# Altium PCB SMART_WATCH.PcbDoc (part 1 of 4)
Units mil, origin at the board's own origin, x right, y up, seen from the top; angles counter-clockwise.
Board outline 2401.57 x 2362.2 mil, 2 copper layers (Top Layer, Bottom Layer); 98 components, 64 nets, 344 pads, 272 vias.
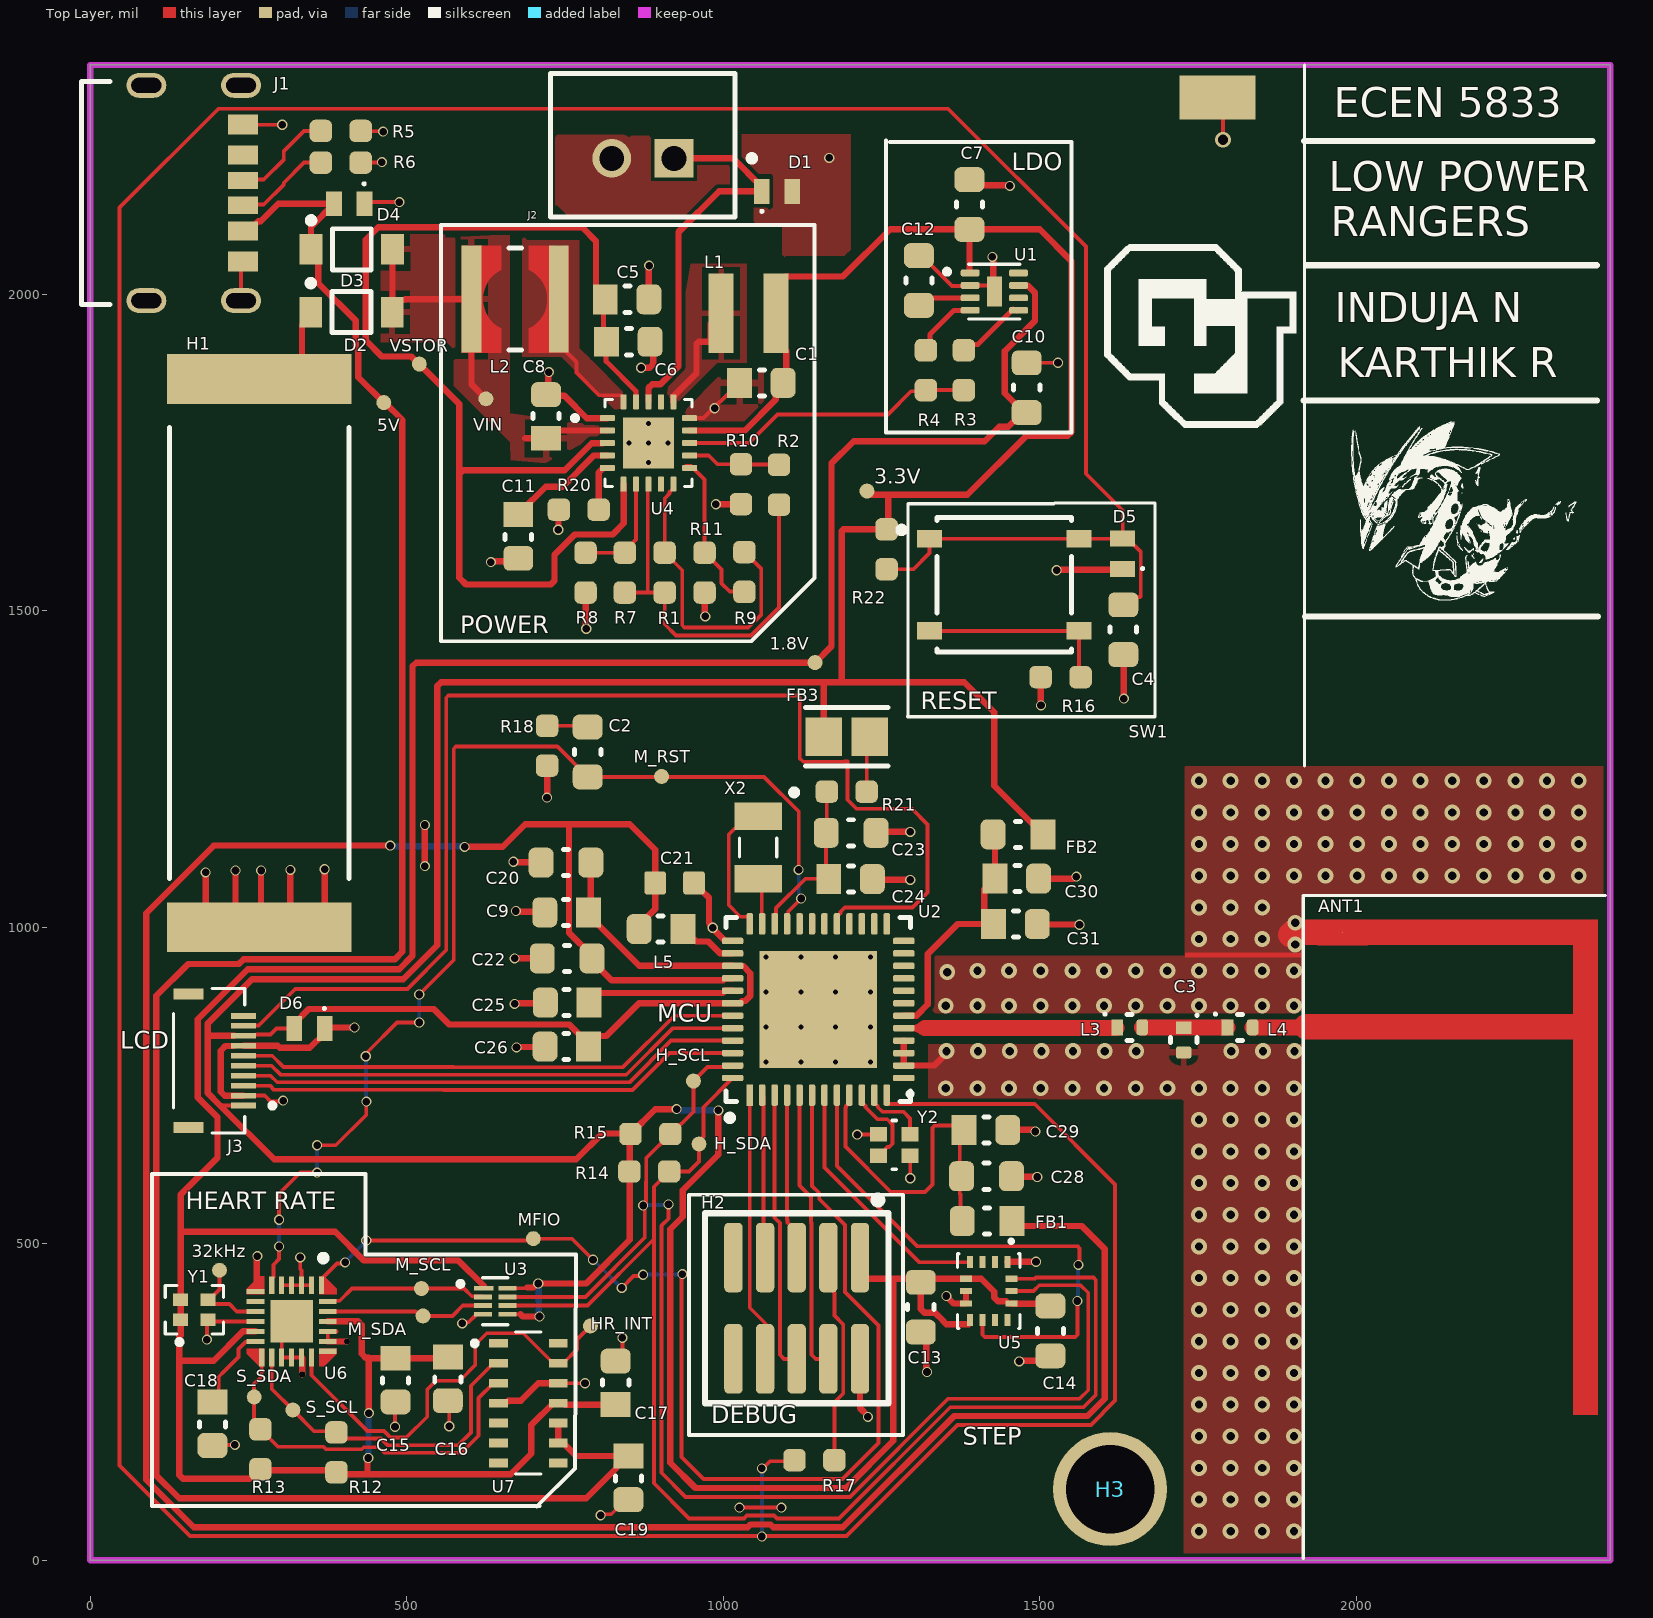
[diagram p0: Top Layer view]
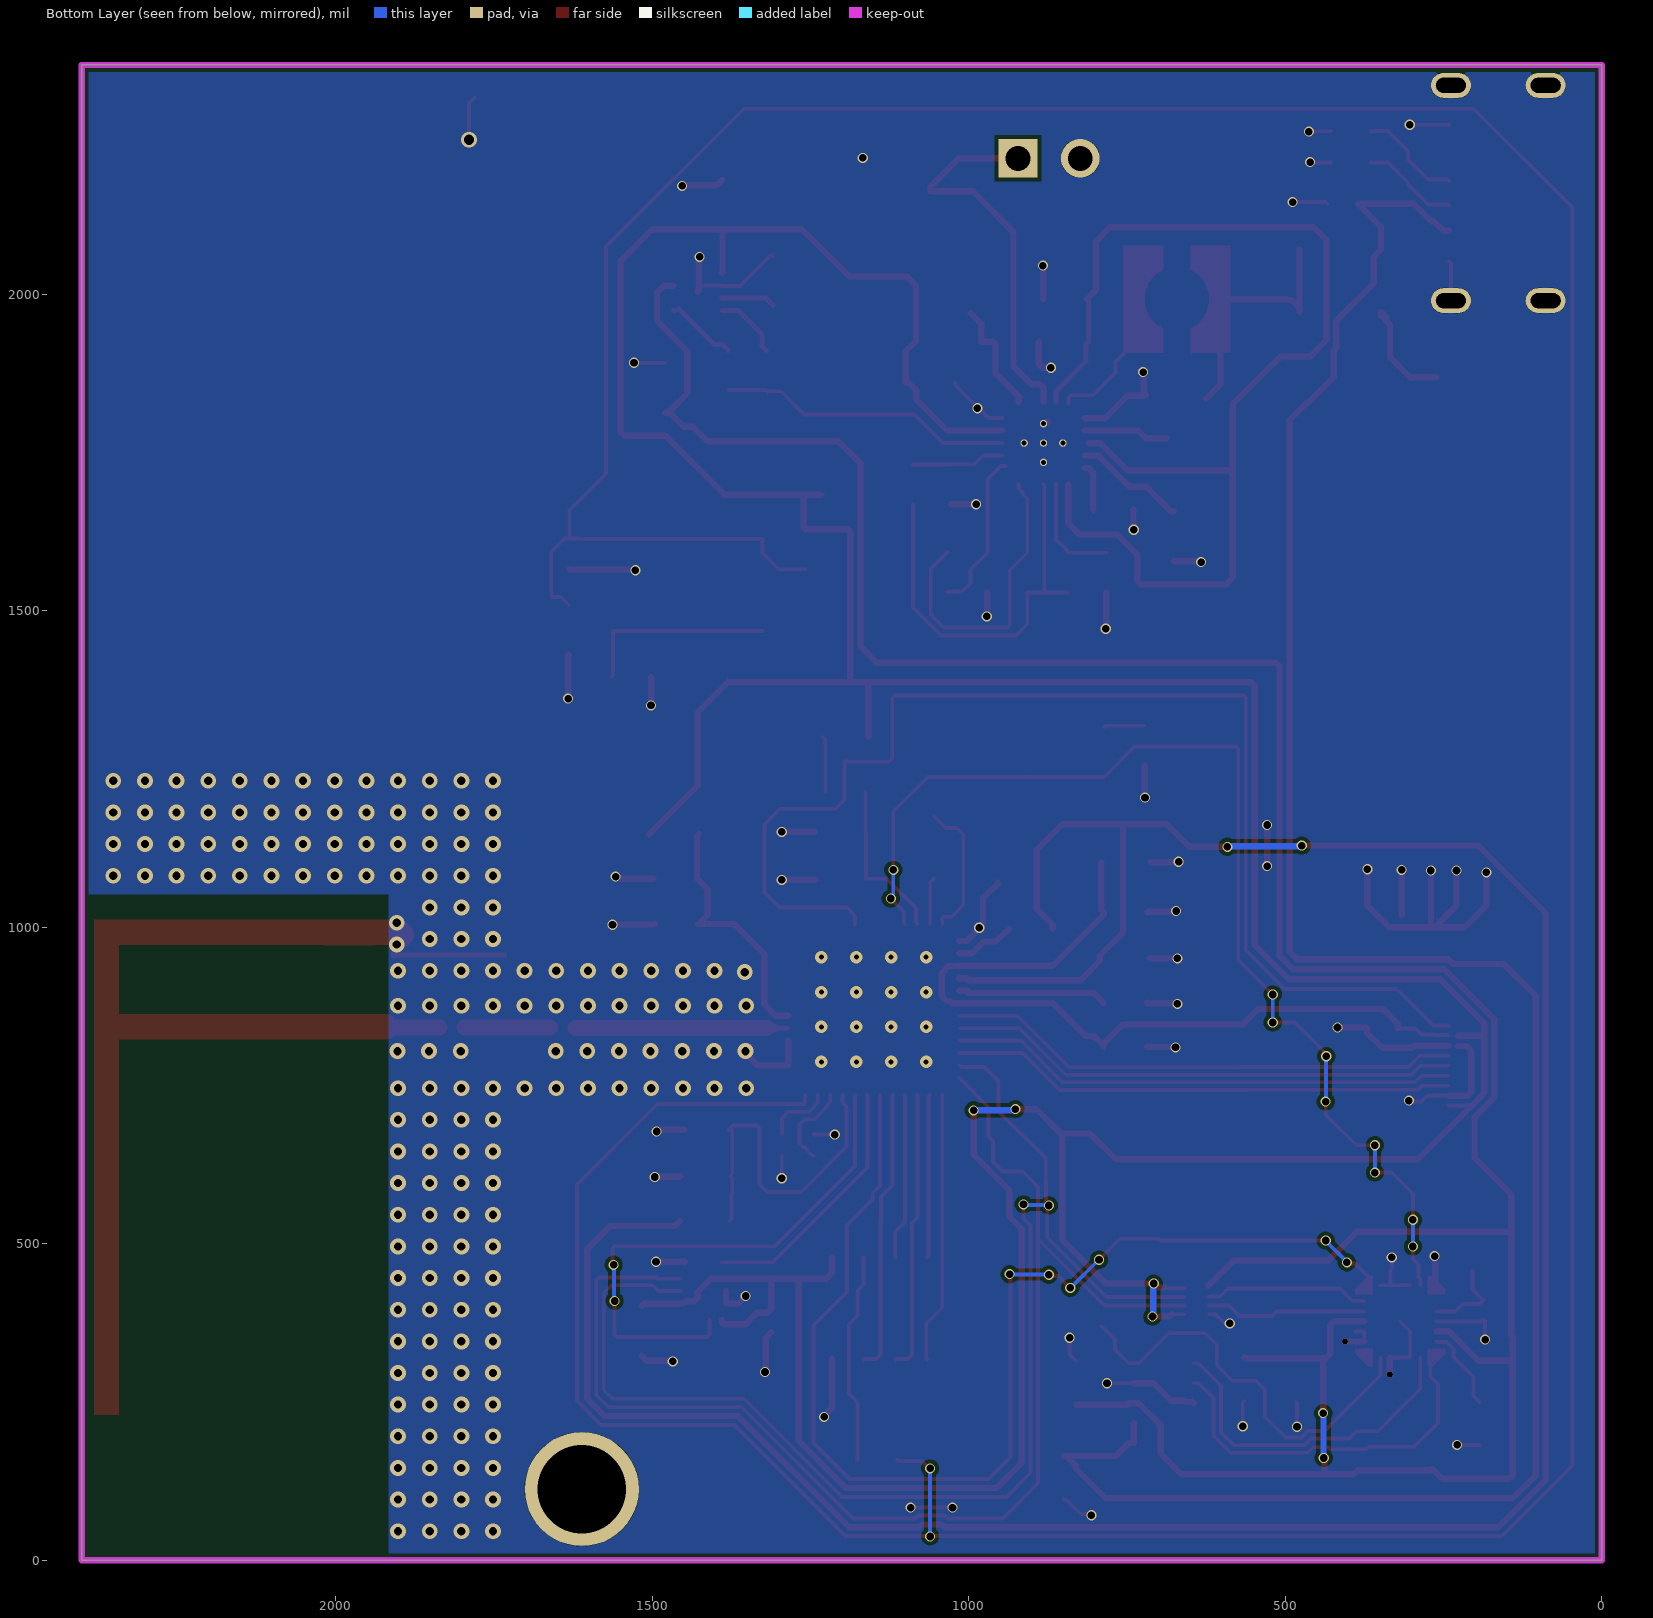
[diagram p1: Bottom Layer view, seen from below]
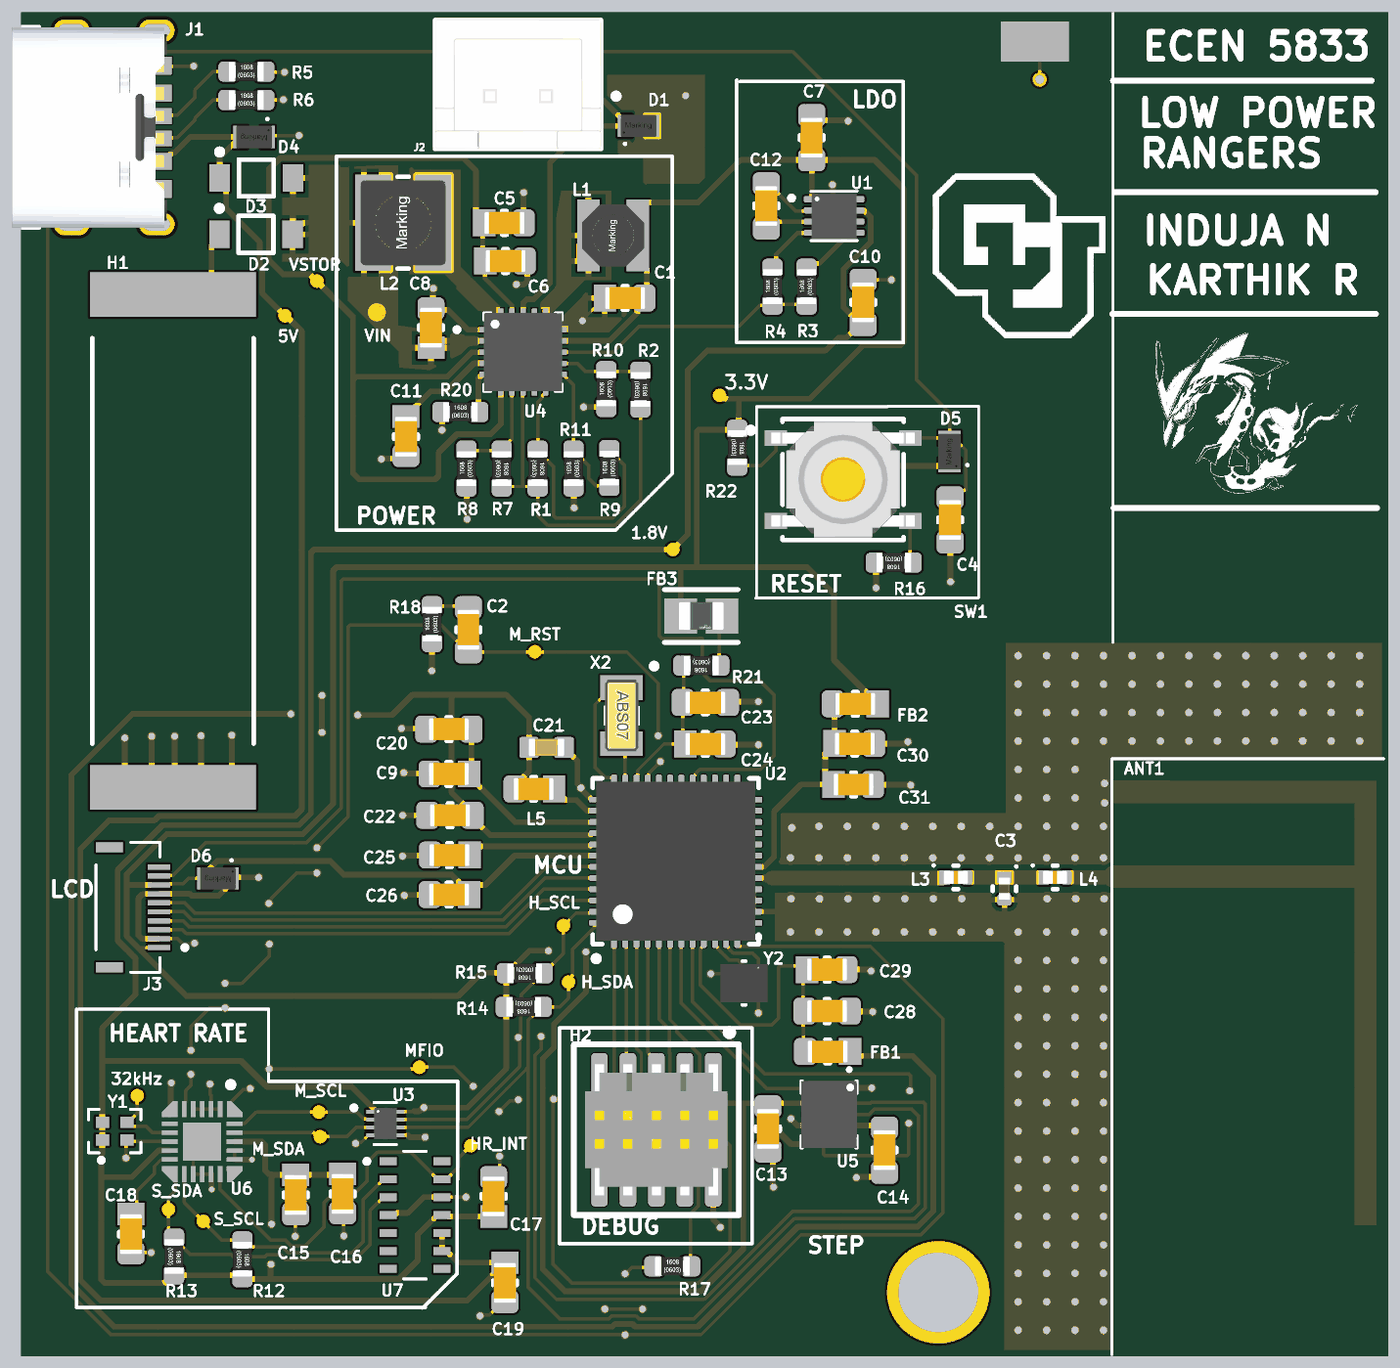
[diagram p3: 3D render of the assembled board from above, using the file's embedded part models]

## Layer stack, top to bottom
Top Solder: solder mask 0.4, Solder Resist, Dk 3.5
Top Layer: signal copper 1.4
Dielectric 1: dielectric 12.6, FR-4, Dk 4.8
Bottom Layer: signal copper 1.4
Bottom Solder: solder mask 0.4, Solder Resist, Dk 3.5

## Board outline
0,0 0,2362.2 2401.57,2362.2 2401.57,0

## Design rules (kind name [scope] priority, off if disabled: settings)
Clearance [All] p1: gap=6 ignorepadtopadclearanceinfootprint=FALSE
MinimumSolderMaskSliver MinimumSolderMaskSliver_1 [InPadClass('All Pads')] p1: minsoldermaskwidth=0.5
MinimumSolderMaskSliver [All] p2: minsoldermaskwidth=4
PolygonConnect GND_L01_P018 [IsNamedPolygon('GND_L01_P018')] p1: thpad.connectstyle=Relief thpad.reliefconductorwidth=10 thpad.reliefentries=4 thpad.polygonreliefangle="90 Angle" thpad.airgapwidth=10 smdpad.connectstyle=Relief smdpad.reliefconductorwidth=10 smdpad.reliefentries=4 smdpad.polygonreliefangle="90 Angle" smdpad.airgapwidth=10 via.connectstyle=Direct via.reliefconductorwidth=10 via.reliefentries=4 via.polygonreliefangle="90 Angle" via.airgapwidth=10
PolygonConnect Antenna [HasFootprint('F_ANTENNA')] p2: connectstyle=Direct reliefconductorwidth=10 reliefentries=4 polygonreliefangle="90 Angle" airgapwidth=10
PolygonConnect GND_P000 [IsNamedPolygon('GND_L02_P000')] p3: connectstyle=Direct reliefconductorwidth=10 reliefentries=4 polygonreliefangle="90 Angle" airgapwidth=10
PolygonConnect GND_P013 [IsNamedPolygon('GND_L01_P013')] p4: connectstyle=Direct reliefconductorwidth=10 reliefentries=4 polygonreliefangle="90 Angle" airgapwidth=10
PolygonConnect GND_P012 [IsNamedPolygon('GND_L01_P012')] p5: connectstyle=Direct reliefconductorwidth=10 reliefentries=4 polygonreliefangle="90 Angle" airgapwidth=10
PolygonConnect GND_P010 [IsNamedPolygon('GND_L01_P010')] p6: connectstyle=Direct reliefconductorwidth=10 reliefentries=4 polygonreliefangle="90 Angle" airgapwidth=10
PolygonConnect GND_P009 [IsNamedPolygon('GND_L01_P009')] p7: connectstyle=Direct reliefconductorwidth=10 reliefentries=4 polygonreliefangle="90 Angle" airgapwidth=10
PolygonConnect GND_P007 [IsNamedPolygon('GND_L01_P007')] p8: connectstyle=Direct reliefconductorwidth=10 reliefentries=4 polygonreliefangle="90 Angle" airgapwidth=10
PolygonConnect GND_P006 [IsNamedPolygon('GND_L01_P006')] p9: connectstyle=Direct reliefconductorwidth=10 reliefentries=4 polygonreliefangle="90 Angle" airgapwidth=10
PolygonConnect GND_P005 [IsNamedPolygon('GND_L01_P005')] p10: connectstyle=Direct reliefconductorwidth=10 reliefentries=4 polygonreliefangle="90 Angle" airgapwidth=10
PolygonConnect GND_P004 [IsNamedPolygon('GND_L01_P004')] p11: connectstyle=Direct reliefconductorwidth=10 reliefentries=4 polygonreliefangle="90 Angle" airgapwidth=10
PolygonConnect GND_P003 [IsNamedPolygon('GND_L01_P003')] p12: connectstyle=Direct reliefconductorwidth=10 reliefentries=4 polygonreliefangle="90 Angle" airgapwidth=10
PolygonConnect GND_P014 [IsNamedPolygon('GND_L01_P014')] p13: connectstyle=Direct reliefconductorwidth=10 reliefentries=4 polygonreliefangle="90 Angle" airgapwidth=10
PolygonConnect GND_P011 [IsNamedPolygon('GND_L01_P011')] p14: connectstyle=Direct reliefconductorwidth=10 reliefentries=4 polygonreliefangle="90 Angle" airgapwidth=10
RoutingVias [All] p1: holewidth=28 width=50 viastyle="Through Hole" minholewidth=28 minwidth=50 maxholewidth=28 maxwidth=50
SolderMaskExpansion [All] p1: expansion=4 istentingtop=FALSE
SupplyNets "Schematic Supply Nets_1" [InNet('+VDCDC')] p1: voltage=0.000
SupplyNets "Schematic Supply Nets_6" [InNet('+1V8_OUT')] p2: voltage=0.000
SupplyNets "Schematic Supply Nets" [InNet('+3V3_OUT')] p3: voltage=0.000
SupplyNets "Schematic Supply Nets_4" [InNet('+5V_USB')] p4: voltage=0.000
SupplyNets "Schematic Supply Nets_5" [InNet('VSTOR')] p5: voltage=0.000
SupplyNets "Schematic Supply Nets_3" [InNet('GND')] p6: voltage=0.000
Width [All] p1: maxlimit=50 minlimit=4 preferedwidth=6 minimp=50.000000 maximp=50.000000 favimp=50.000000
29 further rules are at their usual default settings.

## Classes and differential pairs
component class EFR32BG13_INTERCONNECTS: R14 R15
component class POWER_BLOCK: C1 C5 C6 C7 C8 C10 C11 C12 D1 D2 D3 D4 H1 J1 J2 L1 L2 R1 R2 R3 R4 R5 R6 R7 R8 R9 R10 R11 R20 TP1 TP2 TP3 TP4 U1 U4 vstor
component class LCD: D6 J3 LCD_SCk
component class HEART_RATE: C2 C15 C16 C17 C18 C19 HR_INT M_RST MFIO R12 R13 R18 TP13 TP14 TP15 U6 U7 Y1
component class EFR32G13_POWER_RESET: ANT1 C3 C4 C9 C20 C21 C22 C23 C24 C25 C26 C28 C29 C30 C31 D5 FB1 FB2 FB3 L3 L4 L5 R16 R21 R22 SW1 U2 X2 Y2
component class COMMUNICATION: C13 C14 H2 H3 H_SCL M_SCL M_SDA R17 U3 U5

## Components (designator, comment, footprint, x,y, rotation, side; value= is the part's Value field where it differs from the comment)
1.8V "Test Point" "TEST POINT" 1145,1418 r90 top net-tie (schematic designator TP4)
3.3V "Test Point" "TEST POINT" 1227,1689 r90 top net-tie (schematic designator TP2)
5V "Test Point" "TEST POINT" 463.58,1828.74 r90 top net-tie (schematic designator TP3)
32kHz "Test Point" "TEST POINT" 204,458 r90 top net-tie (schematic designator TP13)
ANT1 "INVERTED F-ANTENNA" F_ANTENNA 1977.17,917.32 r0 top net-tie
C1 "22uF" "Capacitor 0603" 1060,1860 r0 top
C2 "CAP 0.1uF 0603" CAP_0603_1MM 785.73,1276.87 r90 top value=100nF
C3 "CAP 1.5pF 50V 0402" "Capacitor 0402" 1727.44,821.72 r270 top value=1.5pF
C4 "CAP 0.1uF 0603" CAP_0603_1MM 1632,1470 r270 top value=100nF
C5 "GRM188Z71C475KE21D" "CAPACITOR 0603" 848,1992 r0 top value=4.7µF
C6 "CAP 10nF 0603" "Capacitor 0603" 850,1925 r0 top value=10nF
C7 "CAP 10uF 0603" CAP_0603_1MM 1388.89,2141.91 r90 top value=10µF
C8 "GRM188Z71C475KE21D" "CAPACITOR 0603" 720,1807 r90 top value=4.7µF
C9 "CAP 1uF 0603" "CAPACITOR 0603" 752.42,1023.42 r180 top value=1µF
C10 "CAP 2.2uF 0603" CAP_0603_1MM 1479.33,1852.36 r90 top value=2.2µF
C11 "CAP 10nF 0603" "Capacitor 0603" 676.09,1617.31 r270 top value=10nF
C12 "CAP 0.1uF 0603" CAP_0603_1MM 1309.17,2021.83 r90 top value=100nF
C13 "CAP 0.1uF 0603" CAP_0603_1MM 1312.01,399.61 r270 top value=100nF
C14 "CAP 0.1uF 0603" CAP_0603_1MM 1516.73,362.2 r270 top value=100nF
C15 "" "CAPACITOR 0603" 482.28,284.45 r270 top value=1µF
C16 "" "CAPACITOR 0603" 564.77,286.3 r270 top value=1µF
C17 "GRM188Z71C475KE21D" "CAPACITOR 0603" 830,280 r90 top value=4.7µF
C18 "" "CAPACITOR 0603" 192.91,215.55 r270 top value=1µF
C19 "GRM188Z71C475KE21D" "CAPACITOR 0603" 850,130 r270 top value=4.7µF
C20 "CAP 10uF 0603" CAP_0603_1MM 751.43,1102.16 r180 top value=10µF
C21 "16V" CAPC1608X90N 923,1070 r0 top value=4.7uF
C22 "CAP 0.1uF 0603" CAP_0603_1MM 753.34,950.76 r180 top value=100nF
C23 "CAP 10uF 0603" CAP_0603_1MM 1202,1149.08 r0 top value=10µF
C24 "CAP 10nF 0603" "Capacitor 0603" 1201,1076.08 r0 top value=10nF
C25 "CAP 1uF 0603" "CAPACITOR 0603" 753.34,880.87 r180 top value=1µF
C26 "CAP 1uF 0603" "CAPACITOR 0603" 752.85,811.48 r180 top value=1µF
C28 "CAP 100pF 0603" CAP_0603_1MM 1415.95,606.6 r0 top value=100pF
C29 "CAP 10pF 50V 0603" "CAPACITOR 0603" 1414.95,679.6 r0 top value=10pF
C30 "CAP 220nF 10V 0603" "CAPACITOR 0603" 1463.58,1076.77 r0 top value=220nF
C31 "CAP 10pF 50V 0603" "CAPACITOR 0603" 1461.61,1004.92 r0 top value=10pF
D1 "824032815" WE-TVS_DFN1610-2L 1084.56,2162.58 r0 top
D2 "MBR120VLSFT1G" ONSC-SOD-123FL-2-498-01_V 412.6,1971.87 r0 top
D3 "MBR120VLSFT1G" ONSC-SOD-123FL-2-498-01_V 413.07,2071 r0 top
D4 "824032815" WE-TVS_DFN1610-2L 409,2143 r180 top
D5 "824032815" WE-TVS_DFN1610-2L 1631,1590 r90 top
D6 "824032815" WE-TVS_DFN1610-2L 346,840 r180 top
FB1 "BLM18AG601SZ1D" "FERRITE 0603" 1417.95,535.6 r180 top
FB2 "BLM18AG601SZ1D" "FERRITE 0603" 1466.54,1146.65 r180 top
FB3 "BLM21BD102SN1D" FP-BLM21-0_2-T0_85-E0_5-IPC_A 1195,1301 r0 top value=400mΩ
H1 "KXOB25-14X1F-TR" "SOLAR CELL" 266.7,1433 r270 top
H2 "Mini SWD" FTSH-105-01-XXX-DV-K 1116,398 r180 top
H3 "" "PAD Hole" 1611.22,112.2 r0 top
H_SCL "Test Point" "TEST POINT" 952.81,756.94 r180 top net-tie (schematic designator TP9)
H_SDA "Test Point" "Test Point" 961.61,657.48 r90 top net-tie (schematic designator TP7)
HR_INT "Test Point" "TEST POINT" 790,370 r90 top net-tie (schematic designator TP5)
J1 "Female USB Type C" GCT_USB4125-GF-A_REVA2 120,2160 r270 top
J2 "B2B-XH-A(LF)(SN)" FP-B2B-XH-A_LF_SN-MFG 872.94,2235.42 r180 top
J3 "" HRS_TF13BA-10S-0.4SH(800) 187.7,789 r270 top
L1 "744029100" WE-TPC_2813 1040,1970 r90 top
L2 "744031220" WE-TPC_3816 671.17,1992.31 r90 top
L3 "IND 1.9nH" "FERRITE 0402" 1642.13,841.72 r0 top value=1.9nH
L4 "IND 1.9nH" "FERRITE 0402" 1816.44,841.72 r0 top value=1.9nH
L5 "" "Capacitor 0603" 901.57,997.05 r180 top value=4.7µH
M_RST "Test Point" "TEST POINT" 902.56,1238.19 r90 top net-tie (schematic designator TP16)
M_SCL "Test Point" "TEST POINT" 523,429 r90 top net-tie (schematic designator TP8)
M_SDA "Test Point" "TEST POINT" 525.59,385.83 r90 top net-tie (schematic designator TP11)
MFIO "Test Point" "TEST POINT" 699.8,507.87 r90 top net-tie (schematic designator TP17)
R1 "RES 1.24M 0603" RES_0603_1608X06 907.39,1560.22 r270 top value=5.6MΩ
R2 "RES 8.2M 0603" RES_0603_1608X06 1088,1699 r270 top value=8.2MΩ
R3 "RES 0R 0603" RES_0603_1608X06 1380,1880 r90 top value=0R
R4 "RES 0R 0603" RES_0603_1608X06 1320,1880 r90 top value=0R
R5 "RES 5.1K 0603" RES_0603_1608X06 395.7,2258 r0 top value=5.1kΩ
R6 "RES 5.1K 0603" RES_0603_1608X06 395.7,2208 r0 top value=5.1kΩ
R7 "RES 7.32M 0603" RES_0603_1608X06 844.4,1560.22 r270 top value=7.32MΩ
R8 "RES 5.62M 0603" RES_0603_1608X06 782.39,1560.22 r90 top value=5.6MΩ
R9 "RES 6.65M 0603" RES_0603_1608X06 1033.38,1561.2 r90 top value=6.65MΩ
R10 "RES 4.75M 0603" RES_0603_1608X06 1028,1700 r90 top value=4.75MΩ
R11 "RES 4.99M 0603" RES_0603_1608X06 970.39,1560.22 r90 top value=4.99MΩ
R12 "RES 4.7K 0603" RES_0603_1608X06 388.78,170.28 r270 top value=4.7kΩ
R13 "RES 4.7K 0603" RES_0603_1608X06 268.7,175.2 r270 top value=4.7kΩ
R14 "RES 4.7K 0603" RES_0603_1608X06 883,614 r180 top value=4.7kΩ
R15 "RES 4.7K 0603" RES_0603_1608X06 884.84,673.23 r180 top value=4.7kΩ
R16 "" RES_0603_1608X06 1533,1395 r180 top value=100R
R17 "RES 0R 0603" RES_0603_1608X06 1144,158 r0 top value=0R
R18 "10 ohm" RES_0603_1608X06 721.76,1286.71 r90 top
R20 "RES 0R 0603" RES_0603_1608X06 771.57,1659.63 r0 top value=0R
R21 "RES 1Ohm 0603" RES_0603_1608X06 1195,1214.08 r180 top value=1Ω
R22 "" RES_0603_1608X06 1258,1597 r270 top value=4.7kΩ
S_SCL "Test Point" "TEST POINT" 319.98,237.16 r90 top net-tie (schematic designator TP14)
S_SDA "Test Point" "TEST POINT" 258.86,257.87 r90 top net-tie (schematic designator TP15)
SW1 "" SWITCH 1444,1541 r0 top
U1 "MIC5350-SGYMT-TR" SON50P200X200X60-9N 1428.26,2004.12 r0 top
U2 "512GM48-DR*" QFN_48_7X7 1150,870 r90 top
U3 "TXS0102DQER" SON35P140X100X40-8N 639.7,409 r0 top
U4 "BQ25570RGRR" QFN50P350X350X100-21N 881.8,1764.95 r0 top
U5 "BMI270" XDCR_BMI270 1419.34,425.02 r270 top
U6 "MAX32664GTGD+" 21-100264_T2433+2C_MXM 318.05,377.21 r270 top
U7 "MAX30102EFD+T" XDCR_MAX30101EFD+ 691.93,248.03 r0 top
VIN "Test Point" "TEST POINT" 624.91,1834.83 r90 top net-tie (schematic designator TP1)
VSTOR "Test Point" "TEST POINT" 519.69,1889.76 r90 top net-tie (schematic designator TP6)
X2 "XTAL 32.768kHz" XTAL_32.768KHZ-T 1055,1126 r270 top
Y1 "ECS-327MV-DM-TR" OSC_ECS-327MV-DM-TR-4 164.37,395.67 r90 top
Y2 "38.4MHz XTAL" "XTAL 38.4MHZ" 1270,656 r270 top

## Footprints (in the part's own frame and the unit in brackets; to place one, negate y for a bottom-side part, rotate by r counter-clockwise, add the part's x,y. Pads: shape width x height; smd on the part's side, far side on the other; paste and mask are expansions set on the pad)
21-100264_T2433+2C_MXM [mil]
  rect 28x8 smd paste+0 mask+0: 1(-57.09,47.24) 2(-57.09,31.5) 3(-57.09,15.75) 4(-57.09,0) 5(-57.09,-15.75) 6(-57.09,-31.5) 13(57.09,-47.24) 14(57.09,-31.5) 15(57.09,-15.75) 16(57.09,0) 17(57.09,15.75) 18(57.09,31.5)
  rect 8x28 smd paste+0 mask+0: 7(-47.24,-57.09) 8(-31.5,-57.09) 9(-15.75,-57.09) 10(0,-57.09) 11(15.75,-57.09) 12(31.5,-57.09) 19(47.24,57.09) 20(31.5,57.09) 21(15.75,57.09) 22(0,57.09) 23(-15.75,57.09) 24(-31.5,57.09)
  rect 67x67 smd paste+0 mask+0: 25(0,0)
  Top Layer region: -51.24,71.09 -43.24,71.09 -43.24,43.24 -71.09,43.24 -71.09,51.24
  Top Layer region: -71.09,-51.24 -71.09,-43.24 -43.09,-43.24 -43.24,-71.09 -51.24,-71.09
  Top Layer region: 51.24,-71.09 43.24,-71.09 43.25,-43.25 71.09,-43.24 71.09,-51.24
  Top Layer region: 51.24,71.09 43.24,71.09 43.25,43.24 71.09,43.24 71.09,51.24
  silkscreen extent -105,45 -95,55
CAP_0603_1MM [mm]
  rrect50% 1x1.2 smd: 1(-1,0) 2(1,0)
  silkscreen extent -0.1,-0.53 0.1,0.53, body extent -0.9,-0.5 0.9,0.5, height 1
"Capacitor 0402" [mm]
  rect 0.5x0.64 smd: 1(-0.5,0)
  rrect50% 0.5x0.64 smd: 2(0.5,0)
  silkscreen extent -1.04,-0.53 0.1,0.58, body extent -0.5,-0.25 0.5,0.25, height 0.55
"Capacitor 0603" [mm] "Chip Capacitor, 2-Leads, Body 1.60x0.80mm, IPC Medium Density"
  rect 1x1.2 smd: 1(-0.875,0)
  rrect50% 1x1.2 smd: 2(0.875,0)
  silkscreen extent -0.07,-0.53 0.13,0.53, body extent -0.87,-0.5 0.93,0.5, height 1
"CAPACITOR 0603" [mm] "Chip Capacitor, 2-Leads, Body 1.60x0.80mm, IPC Medium Density"
  rect 1x1.2 smd: 1(-0.875,0)
  rrect50% 1x1.2 smd: 2(0.875,0)
  silkscreen extent -0.07,-0.53 0.13,0.53, body extent -0.87,-0.5 0.93,0.5, height 1
CAPC1608X90N [mm]
  rrect25% 0.87x0.93 smd: 1(-0.78,0) 2(0.78,0)
  body extent -0.8,-0.4 0.8,0.4, height 0.9
F_ANTENNA [mil]
  round 1 smd paste-99999 mask-99999: FEED(-1.5,-74.5) GND(1.5,74.5)
  Top Layer region: 38.7,54.72 366.5,54.72 366.5,94.29 38.7,94.29
  Top Layer region: 35.71,-94.28 366.5,-94.3 366.5,-54.7 35.71,-54.7
  Top Layer region: 365.7,-687.5 365.7,94.08 404.3,94.08 404.3,-687.5
  Top Layer region: -37.98,54.5 -37.98,94.5 40.98,94.5 40.98,54.5
  Top Layer region: -40.98,-94.5 -40.98,-54.5 37.98,-54.5 37.98,-94.5
"FERRITE 0402" [mm]
  rect 0.47x0.64 smd: 1(-0.5,0)
  rrect50% 0.47x0.64 smd: 2(0.5,0)
  silkscreen extent -1.04,-0.53 0.1,0.58, body extent -0.55,-0.3 0.55,0.3, height 0.55
"FERRITE 0603" [mm] "EFR32bg13- / RFVDD, PAVDD"
  rect 1x1.2 smd: 1(-0.975,0)
  rrect50% 1x1.2 smd: 2(1.025,0)
  silkscreen extent -0.07,-0.53 0.13,0.53, body extent -0.87,-0.5 0.93,0.5, height 1
FP-B2B-XH-A_LF_SN-MFG [mm]
  rect 1.55x1.55 hole 1 paste-2539.97 mask+0: 1(-1.25,0.525)
  round 1.55 hole 1 paste-2539.97 mask+0: 2(1.25,0.525)
  silkscreen extent -4.5,-2.88 3.7,2.88, body extent -3.8,-2.98 3.8,2.98, height 0.25
FP-BLM21-0_2-T0_85-E0_5-IPC_A [mil]
  rect 57.28x61.27 smd paste+0 mask+0: 1(-36.44,0) 2(36.44,0)
  silkscreen extent -65,-46 65,46, body extent -85,-50 85,50, height 10
FTSH-105-01-XXX-DV-K [mil]
  rrect50% 29x110 smd mask+2: 1(-100,-80) 2(-100,80) 3(-50,-80) 4(-50,80) 5(0,-80) 6(0,80) 7(50,-80) 8(50,80) 9(100,-80) 10(100,80)
  silkscreen extent -145,-177 145,150, body extent -125,-115 125,115, height 241
GCT_USB4125-GF-A_REVA2 [mm]
  rect 0.7x1.2 smd mask+0.051: A5(-0.5,3.08) B5(0.5,3.08)
  rect 0.76x1.2 smd mask+0.051: A9(1.52,3.08) B9(-1.52,3.08)
  rect 0.8x1.2 smd mask+0.051: A12(2.75,3.08) B12(-2.75,3.08)
  oval 1x1.6 hole 0.6 slot 1.2 at 90 deg mask+0: S1(-4.32,3) S2(4.32,3) S3(-4.32,-0.8) S4(4.32,-0.8)
  silkscreen extent -4.47,-3.4 4.47,-2.25, body extent -4.47,-3.45 4.47,3.45, height 3.26
HRS_TF13BA-10S-0.4SH(800) [mm]
  rect 0.23x1 smd: 1(1.8,1.375) 2(1.4,1.375) 3(1,1.375) 4(0.6,1.375) 5(0.2,1.375) 6(-0.2,1.375) 7(-0.6,1.375) 8(-1,1.375) 9(-1.4,1.375) 10(-1.8,1.375)
  rect 0.44x1.2 smd: S1(-2.68,-0.825) S2(2.68,-0.825)
  silkscreen extent -2.9,-1.43 2.9,2.63
ONSC-SOD-123FL-2-498-01_V [mm] "SOD, 2-Leads, Body 2.7x1.65mm"
  rect 0.91x1.22 smd: 1(-1.635,0) 2(1.635,0)
  silkscreen extent -1.76,-0.82 0.78,1.28, body extent -1.35,-0.82 1.35,0.82, height 1
OSC_ECS-327MV-DM-TR-4 [mm]
  rect 0.5x0.6 smd: 1(-0.4,0.55) 2(-0.4,-0.55) 3(0.4,-0.55) 4(0.4,0.55)
  silkscreen extent -1.4,-1.17 0.97,1.17
"PAD Hole" [mil]
  round 180 hole 140: 1(0,0)
QFN50P350X350X100-21N [mm]
  rrect27% 0.6x0.24 smd mask+0: 1(-1.65,1) 2(-1.65,0.5) 3(-1.65,0) 4(-1.65,-0.5) 5(-1.65,-1) 11(1.65,-1) 12(1.65,-0.5) 13(1.65,0) 14(1.65,0.5) 15(1.65,1)
  rrect27% 0.24x0.6 smd mask+0: 6(-1,-1.65) 7(-0.5,-1.65) 8(0,-1.65) 9(0.5,-1.65) 10(1,-1.65) 16(1,1.65) 17(0.5,1.65) 18(0,1.65) 19(-0.5,1.65) 20(-1,1.65)
  rect 2.05x2.05 smd paste-2 mask+0.07: 21(0,0)
  round 0.3 hole 0.2 mask+0: 22(0,0.775) 23(-0.775,0) 24(0,0) 25(0.775,0) 26(0,-0.775)
  silkscreen extent -3.05,-1.75 1.75,1.75, body extent -1.75,-1.75 1.75,1.75, height 1
QFN_48_7X7 [mm] "BLUE GECKO QFN48 2.4GHz 512KB 6"
  rect 4.7x4.7 smd paste-100 mask+0.05: 0(0,0)
  rect 0.86x0.26 smd mask+0.05: 1(-3.435,2.75)
  rrect50% 0.86x0.26 smd mask+0.05: 2(-3.435,2.25) 3(-3.435,1.75) 4(-3.435,1.25) 5(-3.435,0.75) 6(-3.435,0.25) 7(-3.435,-0.25) 8(-3.435,-0.75) 9(-3.435,-1.25) 10(-3.435,-1.75) 11(-3.435,-2.25) 12(-3.435,-2.75) 25(3.435,-2.75) 26(3.435,-2.25) 27(3.435,-1.75) 28(3.435,-1.25) 29(3.435,-0.75) 30(3.435,-0.25) 31(3.435,0.25) 32(3.435,0.75) 33(3.435,1.25) 34(3.435,1.75) 35(3.435,2.25) 36(3.435,2.75)
  rrect50% 0.26x0.86 smd mask+0.05: 13(-2.75,-3.435) 14(-2.25,-3.435) 15(-1.75,-3.435) 16(-1.25,-3.435) 17(-0.75,-3.435) 18(-0.25,-3.435) 19(0.25,-3.435) 20(0.75,-3.435) 21(1.25,-3.435) 22(1.75,-3.435) 23(2.25,-3.435) 24(2.75,-3.435) 37(2.75,3.435) 38(2.25,3.435) 39(1.75,3.435) 40(1.25,3.435) 41(0.75,3.435) 42(0.25,3.435) 43(-0.25,3.435) 44(-0.75,3.435) 45(-1.25,3.435) 46(-1.75,3.435) 47(-2.25,3.435) 48(-2.75,3.435)
  silkscreen extent -4.47,-3.7 3.7,3.7, body extent -3.55,-3.55 3.55,3.55, height 0.9
RES_0603_1608X06 [mm] "Common Footprint for all 0603 resistors"
  rrect50% 0.9x0.9 smd: 1(-0.8,0) 2(0.8,0)
  body extent -0.78,-0.43 0.77,0.42, height 0.45
"SOLAR CELL" [mm]
  rect 2x7.4 smd: N(11,0) P(-11,0)
  silkscreen extent -9.05,-3.6 9.05,3.6, body extent 0,0 0,0
SON35P140X100X40-8N [mm]
  rect 0.77x0.19 smd: 1(-0.465,0.525)
  rect 0.71x0.19 smd: 2(-0.495,0.175) 3(-0.495,-0.175) 4(-0.495,-0.525) 5(0.495,-0.525) 6(0.495,-0.175) 7(0.495,0.175) 8(0.495,0.525)
  silkscreen extent -1.5,-0.94 0.5,0.94, body extent -0.5,-0.7 0.5,0.7, height 0.4
SON50P200X200X60-9N [mm]
  rrect50% 0.76x0.27 smd: 1(-0.97,0.75) 2(-0.97,0.25) 3(-0.97,-0.25) 4(-0.97,-0.75) 5(0.97,-0.75) 6(0.97,-0.25) 7(0.97,0.25) 8(0.97,0.75)
  rect 0.6x1.2 smd paste-0.115: 9(0,0)
  silkscreen extent -2,-1.1 1.03,1.1, body extent -1,-1 1,1, height 0.6
SWITCH [mm]
  rect 1x0.7 smd paste+0 mask+0: 1(-3,1.85) 2(3,1.85) 3(-3,-1.85) 4(3,-1.85)
  silkscreen extent -4.25,-2.7 2.7,2.7, body extent -3.6,-2.8 3.6,2.8, height 0.25
"TEST POINT" [mm]
  round 0.6 smd paste-2539.97: 1(0,0)
"Test Point" [mm]
  round 0.6 smd paste-2539.97: 1(0,0)
WE-TPC_2813 [mm] "Power Inductor, SMD, 2-Leads, body 2.78x2.78mm"
  rect 3.2x1 smd: 1(0,1.1) 2(0,-1.1)
  body extent -1.39,-1.39 1.39,1.39, height 1.2
WE-TPC_3816 [mm] "Power Inductor, SMD, 2-Leads, body 3.8x3.8mm"
  rect 4.3x0.8 smd paste-403.566 mask-403.566: 1(0,1.75) 2(0,-1.75)
  Top Layer region: 2.15,-0.55 2.15,-2.15 -2.15,-2.15 -2.15,-0.55 -1.178,-0.55 -1.178,-0.55 -0.818,-1.01 -0.293,-1.267 0.292,-1.267 0.818,-1.011 1.178,-0.55 1.178,-0.55 1.178,-0.55
  Top Layer region: -2.15,0.55 -2.15,2.15 2.15,2.15 2.15,0.55 1.178,0.55 1.178,0.55 0.818,1.01 0.293,1.267 -0.292,1.267 -0.818,1.011 -1.178,0.55 -1.178,0.55 -1.178,0.55
  silkscreen extent -2.05,-0.25 2.05,0.25, body extent -1.9,-1.9 1.9,1.9, height 1.65
WE-TVS_DFN1610-2L [mm] "TVS Diode, package DFN1610-2L"
  rect 0.625x1 smd: 1(-0.613,0) 2(0.613,0)
  silkscreen extent -0.65,-0.85 -0.55,-0.75, body extent -0.8,-0.5 0.8,0.5, height 0.51
XDCR_BMI270 [mm]
  rect 0.475x0.25 smd: 1(-1.162,0.75) 2(-1.162,0.25) 3(-1.162,-0.25) 4(-1.162,-0.75) 8(1.162,-0.75) 9(1.162,-0.25) 10(1.162,0.25) 11(1.162,0.75)
  rect 0.25x0.475 smd: 5(-0.5,-0.913) 6(0,-0.913) 7(0.5,-0.913) 12(0.5,0.913) 13(0,0.913) 14(-0.5,0.913)
  silkscreen extent -2.07,-1.25 1.5,1.25, body extent -1.5,-1.25 1.5,1.25, height 0.87
XDCR_MAX30101EFD+ [mm]
  rect 0.75x0.35 smd: 1(-1.2,2.4) 2(-1.2,1.6) 3(-1.2,0.8) 4(-1.2,0) 5(-1.2,-0.8) 6(-1.2,-1.6) 7(-1.2,-2.4) 8(1.2,-2.4) 9(1.2,-1.6) 10(1.2,-0.8) 11(1.2,0) 12(1.2,0.8) 13(1.2,1.6) 14(1.2,2.4)
  silkscreen extent -2.25,-2.85 0.51,2.85
"XTAL 38.4MHZ" [mil]
  rect 23x27 smd paste+0 mask+0: 1(-17,25.1) 2(-17,-25.1) 3(17,-25.1) 4(17,25.1)
  silkscreen extent -85,-3 38,29, body extent -34,-41 34,41, height 20
XTAL_32.768KHZ-T [mm]
  rect 1.1x1.9 smd: 1(-1.25,0) 2(1.25,0)
  silkscreen extent -2.32,-0.75 0.38,1.56, body extent -1.6,-0.75 1.6,0.75, height 0.89

## Part data
C1: library part GRM188R61A226ME15D, "CAP CER 22UF 10V X5R 0603", Capacitance="22 uF", Case Code - in=0603, Case Code - mm=1608, Dielectric=X5R, Manufacturer=Murata, Maximum Operating Temperature="+ 85 C", Minimum Operating Temperature="- 55 C", Package / Case="0603 (1608 metric)", Supplier Part Number 1=490-10476-1-ND, Tolerance="20 %", Voltage Rating DC=10V, Brand="Murata Electronics", ComponentLink1Description=http://www.farnell.com/datasheets/2047978.pdf?src-supplier=Element14, ComponentLink1URL=http://www.farnell.com/datasheets/2047978.pdf?src-supplier=Element14, Factory Pack Quantity=4000, Height="0.8 mm", Length="1.6 mm", Manufacturer Part Number=GRM188R61A226ME15D, Packaging=Reel, Pricing 1="1=0.33, 10=0.226, 50=0.1506, 100=0.1279, 500=0.0903, 1000=0.079 (USD)", Product="General Type MLCCs", Product Category="Multilayer Ceramic Capacitors MLCC - SMD/SMT", RoHS=True, Series=GRM, Stock 1=849458, Supplier 1=Digi-Key, Termination Style=SMD/SMT, Type="Voltage and Temperature Derating Recommended Product", Unit Weight="0.000222 oz", Width="0.8 mm"
C2 C4 C12 C13 C14 C22: "0603 0.1 uF 10 V ±10% Tolerance X7R SMT Multilayer Ceramic Chip Capacitor", Case Code (Imperial)=0603, Case Code (Metric)=1608, Dielectric=X7R, Dielectric Material=Ceramic, Manufacturer=Vishay, Manufacturer Part Number=VJ0603Y104KXQCW1BC, Max Operating Temperature=125°C, Min Operating Temperature=-55°C, Supplier Part Number=77AK2911, Supplier Part Number 1=720-1689-1-ND, Tolerance=10%, Voltage Rating (DC)=10V, Case/Package=0603, Category="Ceramic Capacitors", China RoHS=Compliant, ComponentLink1Description=https://datasheet.octopart.com:443/VJ0603Y104KXQCW1BC-Vishay-datasheet-182138897.pdf?src-supplier=IHS, ComponentLink1URL=https://datasheet.octopart.com:443/VJ0603Y104KXQCW1BC-Vishay-datasheet-182138897.pdf?src-supplier=IHS, ComponentLink2Description=https://datasheet.octopart.com:443/VJ0603Y104KXQCW1BC-Vishay-datasheet-182137611.pdf?src-supplier=IHS, ComponentLink2URL=https://datasheet.octopart.com:443/VJ0603Y104KXQCW1BC-Vishay-datasheet-182137611.pdf?src-supplier=IHS, ComponentLink3Description=https://datasheet.octopart.com:443/VJ0603Y104KXQCW1BC-Vishay-datasheet-79783898.pdf?src-supplier=Future+Electronics, ComponentLink3URL=https://datasheet.octopart.com:443/VJ0603Y104KXQCW1BC-Vishay-datasheet-79783898.pdf?src-supplier=Future+Electronics, ComponentLink4Description=https://datasheet.octopart.com/VJ0603Y104KXQCW1BC-Vishay-datasheet-13530908.pdf, ComponentLink4URL=https://datasheet.octopart.com/VJ0603Y104KXQCW1BC-Vishay-datasheet-13530908.pdf, ComponentLink5Description=https://datasheet.octopart.com/VJ0603Y104KXQCW1BC-Vishay-datasheet-13436109.pdf, ComponentLink5URL=https://datasheet.octopart.com/VJ0603Y104KXQCW1BC-Vishay-datasheet-13436109.pdf, ComponentLink6Description=https://datasheet.octopart.com/VJ0603Y104KXQCW1BC-Vishay-datasheet-13168783.pdf, ComponentLink6URL=https://datasheet.octopart.com/VJ0603Y104KXQCW1BC-Vishay-datasheet-13168783.pdf, ComponentLink7Description=https://datasheet.octopart.com/VJ0603Y104KXQCW1BC-Vishay-datasheet-13134009.pdf, ComponentLink7URL=https://datasheet.octopart.com/VJ0603Y104KXQCW1BC-Vishay-datasheet-13134009.pdf, ComponentLink8Description=https://datasheet.octopart.com/VJ0603Y104KXQCW1BC-Vishay-datasheet-13055807.pdf, ComponentLink8URL=https://datasheet.octopart.com/VJ0603Y104KXQCW1BC-Vishay-datasheet-13055807.pdf, ComponentLink9Description=https://datasheet.octopart.com/VJ0603Y104KXQCW1BC-Vishay-datasheet-13029350.pdf, ComponentLink9URL=https://datasheet.octopart.com/VJ0603Y104KXQCW1BC-Vishay-datasheet-13029350.pdf, ComponentLink10Description=https://datasheet.octopart.com/VJ0603Y104KXQCW1BC-Vishay-datasheet-12584848.pdf, ComponentLink10URL=https://datasheet.octopart.com/VJ0603Y104KXQCW1BC-Vishay-datasheet-12584848.pdf, ComponentLink11Description=https://datasheet.octopart.com/VJ0603Y104KXQCW1BC-Vishay-datasheet-12543093.pdf, ComponentLink11URL=https://datasheet.octopart.com/VJ0603Y104KXQCW1BC-Vishay-datasheet-12543093.pdf, ComponentLink12Description=https://datasheet.octopart.com/VJ0603Y104KXQCW1BC-Vishay-datasheet-12532924.pdf, ComponentLink12URL=https://datasheet.octopart.com/VJ0603Y104KXQCW1BC-Vishay-datasheet-12532924.pdf, ComponentLink13Description=https://datasheet.octopart.com/VJ0603Y104KXQCW1BC-Vishay-datasheet-12519409.pdf, ComponentLink13URL=https://datasheet.octopart.com/VJ0603Y104KXQCW1BC-Vishay-datasheet-12519409.pdf, ComponentLink14Description=https://datasheet.octopart.com/VJ0603Y104KXQCW1BC-Vishay-datasheet-12509873.pdf, ComponentLink14URL=https://datasheet.octopart.com/VJ0603Y104KXQCW1BC-Vishay-datasheet-12509873.pdf, ComponentLink15Description=http://sigma.octopart.com:80/rohs_statement/Vishay-company-15.pdf?src-supplier=Compliance+Statements, ComponentLink15URL=http://sigma.octopart.com:80/rohs_statement/Vishay-company-15.pdf?src-supplier=Compliance+Statements, Depth=800µm, Height=870µm, Lead Free="Lead Free", Length=1.6mm, Lifecycle Status=Production, Mounting Technology="Surface Mount", Number of Terminals=2, Pricing="4000=0.028, 8000=0.026 (USD)", REACH SVHC=Yes, RoHS=Compliant, Schedule B="8532240020, 8532240020|8532240020|8532240020|8532240020|8532240020", Stock=20000, Supplier=Newark, Supplier 1=DigiKey, Termination=SMD/SMT, Width=800µm
C3: "Ceramic Capacitor, Multilayer, Ceramic, 50V, 3.33% +Tol, 3.33% -Tol, C0G, 30ppm/Cel TC, 0.0000015uF, Surface Mount, 0402", Capacitor Type=Ceramic, Case/Package=0402, Manufacturer=Murata, Manufacturer Part Number=GJM1555C1H1R5WB01D, Max Operating Temperature=125°C, Min Operating Temperature=-55°C, Package Shape=Rectangular, Package Style=SMTMeter, Rated DC Voltage (URdc)=50V, Supplier Part Number=490-11199-1-ND, Temperature Characteristics Code=C0G, Tolerance  (fill in as +-)=3.33%, Category="Ceramic Capacitors", ComponentLink1Description=https://datasheet.ciiva.com:443/pdfs/VipMasterIC/IC/MURE/MURE-S-A0004378008/MURE-S-A0004383770-1.pdf?src-supplier=IHS+Markit, ComponentLink1URL=https://datasheet.ciiva.com:443/pdfs/VipMasterIC/IC/MURE/MURE-S-A0004378008/MURE-S-A0004383770-1.pdf?src-supplier=IHS+Markit, ComponentLink2Description=https://datasheet.ciiva.com/18183/getdatasheetpartid-312921-18183825.pdf?src-supplier=Verical, ComponentLink2URL=https://datasheet.ciiva.com/18183/getdatasheetpartid-312921-18183825.pdf?src-supplier=Verical, Dielectric Material=Ceramic, Height=0.5mm, JESD-609 Code=e3, Length=1mm, Mounting Technology="Surface Mount", Multilayer=Yes, Packaging="Tape and Reel", Pins=2, Pricing="1=0.16, 10=0.091, 50=0.0634, 100=0.0549, 500=0.04062, 1000=0.03616, 2500=0.03144, 5000=0.02857 (USD)", Reach SVHC Compliant=Yes, RoHS=Yes, RoHS Compliant=Yes, Stock=52422, Supplier=Digikey, Terminal Finish=Nickel, Termination=Wraparound, Tolerance (fill in as +-)=3.33%, Width=0.5mm
C5 C8 C17 C19: library part "CAP 4.7uF 16V X7R", "16V 4.7uF X7R ±10% 0603 Multilayer Ceramic Capacitors MLCC - SMD/SMT ROHS", Case/Package=0603, Dielectric Material=Ceramic, Manufacturer=Murata, Manufacturer Lifecycle Status="IN PRODUCTION", Max Operating Temperature=125°C, Min Operating Temperature=-55°C, Supplier Part Number=64AJ4376, Supplier Part Number 1=490-GRM188Z71C475KE21DCT-ND, Tolerance=10%, Voltage Rating=16V, Category="Ceramic Capacitors", ComponentLink1Description=https://datasheet.octopart.com:443/GRM188Z71C475KE21D-Murata-datasheet-141276020.pdf?src-supplier=Geoflip, ComponentLink1URL=https://datasheet.octopart.com:443/GRM188Z71C475KE21D-Murata-datasheet-141276020.pdf?src-supplier=Geoflip, ComponentLink2Description=https://datasheet.octopart.com:443/GRM188Z71C475KE21D-Murata-datasheet-165579666.pdf?src-supplier=TME, ComponentLink2URL=https://datasheet.octopart.com:443/GRM188Z71C475KE21D-Murata-datasheet-165579666.pdf?src-supplier=TME, ComponentLink3Description=https://datasheet.octopart.com:443/GRM188Z71C475KE21D-Murata-datasheet-140705917.pdf?src-supplier=Ciiva, ComponentLink3URL=https://datasheet.octopart.com:443/GRM188Z71C475KE21D-Murata-datasheet-140705917.pdf?src-supplier=Ciiva, ComponentLink4Description=https://datasheet.octopart.com:443/GRM188Z71C475KE21D-Murata-datasheet-138743435.pdf?src-supplier=Ciiva, ComponentLink4URL=https://datasheet.octopart.com:443/GRM188Z71C475KE21D-Murata-datasheet-138743435.pdf?src-supplier=Ciiva, ComponentLink5Description=http://sigma.octopart.com:80/reach_statement/Murata-company-16.pdf?src-supplier=Compliance+Statements, ComponentLink5URL=http://sigma.octopart.com:80/reach_statement/Murata-company-16.pdf?src-supplier=Compliance+Statements, Height=800µm, Length=1.6mm, Lifecycle Status=Production, Manufacturer Part Number=GRM188Z71C475KE21D, Material=Ceramic, Mounting Technology="Surface Mount", Number of Terminals=2, Pricing="10=0.105, 25=0.097, 50=0.089, 100=0.081, 250=0.078, 500=0.074, 1000=0.067 (USD)", REACH SVHC=Yes, RoHS=Compliant, Stock=28269, Supplier=Newark, Supplier 1=DigiKey, Thickness=800µm, Voltage Rating (DC)=16V, Width=800µm
C6 C11 C24: "Multilayer Ceramic Capacitors MLCC - SMD/SMT 16V 0.01uF X7R 0603 10% AEC-Q200", Dielectric=X7R, Dielectric Material=Ceramic, Manufacturer=KEMET, Manufacturer Part Number=C0603C103K4RECAUTO, Max Operating Temperature=125°C, Min Operating Temperature=-55°C, Supplier Part Number=76AH8427, Supplier Part Number 1=399-17880-1-ND, Voltage Rating (DC)=16V, Category="Ceramic Capacitors", China RoHS=Compliant, ComponentLink1Description=https://datasheet.octopart.com:443/C0603C103K4RECAUTO-KEMET-datasheet-178568699.pdf?src-supplier=IHS, ComponentLink1URL=https://datasheet.octopart.com:443/C0603C103K4RECAUTO-KEMET-datasheet-178568699.pdf?src-supplier=IHS, ComponentLink2Description=https://datasheet.octopart.com:443/C0603C103K4RECAUTO-KEMET-datasheet-189767465.pdf?src-supplier=ODG+(Origin+Data+Global), ComponentLink2URL=https://datasheet.octopart.com:443/C0603C103K4RECAUTO-KEMET-datasheet-189767465.pdf?src-supplier=ODG+(Origin+Data+Global), ComponentLink3Description=https://datasheet.octopart.com:443/C0603C103K4RECAUTO-KEMET-datasheet-149521825.pdf?src-supplier=Farnell, ComponentLink3URL=https://datasheet.octopart.com:443/C0603C103K4RECAUTO-KEMET-datasheet-149521825.pdf?src-supplier=Farnell, ComponentLink4Description=https://datasheet.octopart.com:443/C0603C103K4RECAUTO-KEMET-datasheet-153706760.pdf?src-supplier=Farnell, ComponentLink4URL=https://datasheet.octopart.com:443/C0603C103K4RECAUTO-KEMET-datasheet-153706760.pdf?src-supplier=Farnell, ComponentLink5Description=https://datasheet.octopart.com:443/C0603C103K4RECAUTO-KEMET-datasheet-153410967.pdf?src-supplier=Electro+Sonic, ComponentLink5URL=https://datasheet.octopart.com:443/C0603C103K4RECAUTO-KEMET-datasheet-153410967.pdf?src-supplier=Electro+Sonic, ComponentLink6Description=https://datasheet.octopart.com:443/C0603C103K4RECAUTO-KEMET-datasheet-176334325.pdf?src-supplier=Newark, ComponentLink6URL=https://datasheet.octopart.com:443/C0603C103K4RECAUTO-KEMET-datasheet-176334325.pdf?src-supplier=Newark, ComponentLink7Description=https://datasheet.octopart.com:443/C0603C103K4RECAUTO-KEMET-datasheet-158241778.pdf?src-supplier=TME, ComponentLink7URL=https://datasheet.octopart.com:443/C0603C103K4RECAUTO-KEMET-datasheet-158241778.pdf?src-supplier=TME, Height=800µm, Length=1.6mm, Lifecycle Status=Production, Mounting Technology="Surface Mount", Number of Terminals=2, Pricing="1=0.02, 25=0.02, 50=0.02, 100=0.02, 250=0.02, 500=0.02, 1000=0.02 (USD)", REACH SVHC=Yes, RoHS=Compliant, Schedule B="8532240020, 8532240020|8532240020, 8532240020|8532240020|8532240020, 8532240020|8532240020|8532240020|8532240020", Stock=3130, Supplier=Newark, Supplier 1=DigiKey, Width=800µm
C7 C20 C23: "10V 10uF X7R ±10% 0603 Multilayer Ceramic Capacitors MLCC - SMD/SMT ROHS", Case/Package=0603, Dielectric Material=Ceramic, Manufacturer=Murata, Manufacturer Lifecycle Status="IN PRODUCTION", Manufacturer Part Number=GRM188Z71A106KA73D, Max Operating Temperature=125°C, Min Operating Temperature=-55°C, Supplier Part Number 1=490-GRM188Z71A106KA73DCT-ND, Tolerance=10%, Voltage Rating=10V, Category="Ceramic Capacitors", ComponentLink1Description=https://datasheet.octopart.com:443/GRM188Z71A106KA73D-Murata-datasheet-141276001.pdf?src-supplier=Geoflip, ComponentLink1URL=https://datasheet.octopart.com:443/GRM188Z71A106KA73D-Murata-datasheet-141276001.pdf?src-supplier=Geoflip, ComponentLink2Description=https://datasheet.octopart.com:443/GRM188Z71A106KA73D-Murata-datasheet-165579666.pdf?src-supplier=TME, ComponentLink2URL=https://datasheet.octopart.com:443/GRM188Z71A106KA73D-Murata-datasheet-165579666.pdf?src-supplier=TME, ComponentLink3Description=https://datasheet.octopart.com:443/GRM188Z71A106KA73D-Murata-datasheet-140705911.pdf?src-supplier=Ciiva, ComponentLink3URL=https://datasheet.octopart.com:443/GRM188Z71A106KA73D-Murata-datasheet-140705911.pdf?src-supplier=Ciiva, ComponentLink4Description=https://datasheet.octopart.com:443/GRM188Z71A106KA73D-Murata-datasheet-138743429.pdf?src-supplier=Ciiva, ComponentLink4URL=https://datasheet.octopart.com:443/GRM188Z71A106KA73D-Murata-datasheet-138743429.pdf?src-supplier=Ciiva, ComponentLink5Description=http://sigma.octopart.com:80/reach_statement/Murata-company-16.pdf?src-supplier=Compliance+Statements, ComponentLink5URL=http://sigma.octopart.com:80/reach_statement/Murata-company-16.pdf?src-supplier=Compliance+Statements, Height=800µm, Length=1.6mm, Lifecycle Status=Production, Material=Ceramic, Mounting Technology="Surface Mount", Number of Terminals=2, Pricing="4000=0.04684, 8000=0.04661, 16000=0.04637, 24000=0.04613, 32000=0.04589 (USD)", REACH SVHC=Yes, RoHS=Compliant, Schedule B="8532240020, 8532240020|8532240020|8532240020|8532240020|8532240020", Stock=36000, Supplier=Avnet, Supplier 1=DigiKey, Supplier Part Number=GRM188Z71A106KA73D, Thickness=800µm, Voltage Rating (DC)=10V, Width=800µm
C9 C25 C26: "16V 1uF X7R ±10% 0603 Multilayer Ceramic Capacitors MLCC - SMD/SMT ROHS", Case Code (Imperial)=0603, Case Code (Metric)=1608, Dielectric=X7R, Dielectric Material=Ceramic, Manufacturer="Samsung Electro-Mechanics", Manufacturer Part Number=CL10B105KO8NNNC, Max Operating Temperature=125°C, Min Operating Temperature=-55°C, Supplier Part Number=1276-1019-1-ND, Tolerance=10%, Voltage=16V, Case/Package=0603, Category="Ceramic Capacitors", China RoHS=Compliant, ComponentLink1Description=https://datasheet.octopart.com:443/CL10B105KO8NNNC-Samsung-Electro-Mechanics-datasheet-137745070.pdf?src-supplier=IHS, ComponentLink1URL=https://datasheet.octopart.com:443/CL10B105KO8NNNC-Samsung-Electro-Mechanics-datasheet-137745070.pdf?src-supplier=IHS, ComponentLink2Description=https://datasheet.octopart.com/CL10B105KO8NNNC-Samsung-Electro-Mechanics-datasheet-8324245.pdf, ComponentLink2URL=https://datasheet.octopart.com/CL10B105KO8NNNC-Samsung-Electro-Mechanics-datasheet-8324245.pdf, ComponentLink3Description=https://datasheet.octopart.com/CL10B105KO8NNNC-Samsung-Electro-Mechanics-datasheet-97040617.pdf, ComponentLink3URL=https://datasheet.octopart.com/CL10B105KO8NNNC-Samsung-Electro-Mechanics-datasheet-97040617.pdf, ComponentLink4Description=https://datasheet.octopart.com/General-Multilayer-Ceramic-Capacitors-Samsung-datasheet-family-111.pdf, ComponentLink4URL=https://datasheet.octopart.com/General-Multilayer-Ceramic-Capacitors-Samsung-datasheet-family-111.pdf, ComponentLink5Description=https://datasheet.octopart.com:443/CL10B105KO8NNNC-Samsung-Electro-Mechanics-datasheet-116890984.pdf?src-supplier=Future+Electronics, ComponentLink5URL=https://datasheet.octopart.com:443/CL10B105KO8NNNC-Samsung-Electro-Mechanics-datasheet-116890984.pdf?src-supplier=Future+Electronics, ComponentLink6Description=https://datasheet.octopart.com:443/CL10B105KO8NNNC-Samsung-Electro-Mechanics-datasheet-81461852.pdf?src-supplier=Future+Electronics, ComponentLink6URL=https://datasheet.octopart.com:443/CL10B105KO8NNNC-Samsung-Electro-Mechanics-datasheet-81461852.pdf?src-supplier=Future+Electronics, ComponentLink7Description=https://datasheet.octopart.com:443/CL10B105KO8NNNC-Samsung-datasheet-42770397.pdf?src-supplier=Future+Electronics, ComponentLink7URL=https://datasheet.octopart.com:443/CL10B105KO8NNNC-Samsung-datasheet-42770397.pdf?src-supplier=Future+Electronics, ComponentLink8Description=https://datasheet.octopart.com:443/CL10B105KO8NNNC-Samsung-datasheet-26669023.pdf?src-supplier=Future+Electronics, ComponentLink8URL=https://datasheet.octopart.com:443/CL10B105KO8NNNC-Samsung-datasheet-26669023.pdf?src-supplier=Future+Electronics, ComponentLink9Description=https://datasheet.octopart.com:443/CL10B105KO8NNNC-Samsung-Electro-Mechanics-datasheet-149136799.pdf?src-supplier=Future+Electronics, ComponentLink9URL=https://datasheet.octopart.com:443/CL10B105KO8NNNC-Samsung-Electro-Mechanics-datasheet-149136799.pdf?src-supplier=Future+Electronics, ComponentLink10Description=https://datasheet.octopart.com:443/CL10B105KO8NNNC-Samsung-datasheet-151956584.pdf?src-supplier=SOS+electronic, ComponentLink10URL=https://datasheet.octopart.com:443/CL10B105KO8NNNC-Samsung-datasheet-151956584.pdf?src-supplier=SOS+electronic, ComponentLink11Description=https://datasheet.octopart.com:443/CL10B105KO8NNNC-Samsung-Electro-Mechanics-datasheet-11774093.pdf?src-supplier=Arrow+Electronics, ComponentLink11URL=https://datasheet.octopart.com:443/CL10B105KO8NNNC-Samsung-Electro-Mechanics-datasheet-11774093.pdf?src-supplier=Arrow+Electronics, ComponentLink12Description=https://datasheet.octopart.com:443/CL10B105KO8NNNC-Samsung-datasheet-59220082.pdf?src-supplier=TME, ComponentLink12URL=https://datasheet.octopart.com:443/CL10B105KO8NNNC-Samsung-datasheet-59220082.pdf?src-supplier=TME, ComponentLink13Description=http://sigma.octopart.com:80/rohs_certificate/General-Multilayer-Ceramic-Capacitors-Samsung-family-110.pdf?src-supplier=Compliance+Statements, ComponentLink13URL=http://sigma.octopart.com:80/rohs_certificate/General-Multilayer-Ceramic-Capacitors-Samsung-family-110.pdf?src-supplier=Compliance+Statements, ComponentLink14Description=http://sigma.octopart.com:80/rohs_statement/General-Multilayer-Ceramic-Capacitors-Samsung-family-132.pdf?src-supplier=Compliance+Statements, ComponentLink14URL=http://sigma.octopart.com:80/rohs_statement/General-Multilayer-Ceramic-Capacitors-Samsung-family-132.pdf?src-supplier=Compliance+Statements, ComponentLink15Description=http://sigma.octopart.com:80/reach_statement/General-Multilayer-Ceramic-Capacitors-Samsung-family-133.pdf?src-supplier=Compliance+Statements, ComponentLink15URL=http://sigma.octopart.com:80/reach_statement/General-Multilayer-Ceramic-Capacitors-Samsung-family-133.pdf?src-supplier=Compliance+Statements, Depth=800µm, Height=800µm, Lead Free="Lead Free", Length=1.6mm, Lifecycle Status=Production, Material=Ceramic, Mounting Technology="Surface Mount", Number of Terminals=2, Pricing="1=0.08, 10=0.011, 50=0.010, 100=0.0088 (USD)", Radiation Hardening=No, REACH SVHC=Yes, RoHS=Compliant, Schedule B="8532240020, 8532240020|8532240020, 8532240020|8532240020|8532240020, 8532240020|8532240020|8532240020|8532240020", Stock=1501586, Supplier=DigiKey, Supplier 1=DigiKey, Supplier Part Number 1=1276-1019-1-ND, Thickness=889µm, Voltage Rating=16V, Voltage Rating (DC)=16V, Width=800µm
C10: "10V 2.2uF X7R ±10% 0603 Multilayer Ceramic Capacitors MLCC - SMD/SMT ROHS", Case Code (Imperial)=0603, Case Code (Metric)=1608, Dielectric=X7R, Dielectric Material=Ceramic, Manufacturer="Samsung Electro-Mechanics", Manufacturer Part Number=CL10B225KP8NNNC, Max Operating Temperature=125°C, Min Operating Temperature=-55°C, Supplier Part Number=1276-1134-1-ND, Tolerance=10%, Voltage Rating=10V, Case/Package=0603, Category="Ceramic Capacitors", China RoHS=Compliant, ComponentLink1Description=https://datasheet.octopart.com:443/CL10B225KP8NNNC-Samsung-Electro-Mechanics-datasheet-182020320.pdf?src-supplier=IHS, ComponentLink1URL=https://datasheet.octopart.com:443/CL10B225KP8NNNC-Samsung-Electro-Mechanics-datasheet-182020320.pdf?src-supplier=IHS, ComponentLink2Description=https://datasheet.octopart.com:443/CL10B225KP8NNNC-Samsung-Electro-Mechanics-datasheet-136482340.pdf?src-supplier=Future+Electronics, ComponentLink2URL=https://datasheet.octopart.com:443/CL10B225KP8NNNC-Samsung-Electro-Mechanics-datasheet-136482340.pdf?src-supplier=Future+Electronics, ComponentLink3Description=https://datasheet.octopart.com:443/CL10B225KP8NNNC-Samsung-Electro-Mechanics-datasheet-116120883.pdf?src-supplier=Future+Electronics, ComponentLink3URL=https://datasheet.octopart.com:443/CL10B225KP8NNNC-Samsung-Electro-Mechanics-datasheet-116120883.pdf?src-supplier=Future+Electronics, ComponentLink4Description=https://datasheet.octopart.com:443/CL10B225KP8NNNC-Samsung-Electro-Mechanics-datasheet-81461883.pdf?src-supplier=Future+Electronics, ComponentLink4URL=https://datasheet.octopart.com:443/CL10B225KP8NNNC-Samsung-Electro-Mechanics-datasheet-81461883.pdf?src-supplier=Future+Electronics, ComponentLink5Description=https://datasheet.octopart.com:443/CL10B225KP8NNNC-Samsung-datasheet-26669043.pdf?src-supplier=Future+Electronics, ComponentLink5URL=https://datasheet.octopart.com:443/CL10B225KP8NNNC-Samsung-datasheet-26669043.pdf?src-supplier=Future+Electronics, ComponentLink6Description=https://datasheet.octopart.com:443/CL10B225KP8NNNC-Samsung-datasheet-12521702.pdf?src-supplier=Future+Electronics, ComponentLink6URL=https://datasheet.octopart.com:443/CL10B225KP8NNNC-Samsung-datasheet-12521702.pdf?src-supplier=Future+Electronics, ComponentLink7Description=https://datasheet.octopart.com:443/CL10B225KP8NNNC-Samsung-Electro-Mechanics-datasheet-149136832.pdf?src-supplier=Future+Electronics, ComponentLink7URL=https://datasheet.octopart.com:443/CL10B225KP8NNNC-Samsung-Electro-Mechanics-datasheet-149136832.pdf?src-supplier=Future+Electronics, ComponentLink8Description=https://datasheet.octopart.com:443/CL10B225KP8NNNC-Samsung-datasheet-37081328.pdf?src-supplier=Future+Electronics, ComponentLink8URL=https://datasheet.octopart.com:443/CL10B225KP8NNNC-Samsung-datasheet-37081328.pdf?src-supplier=Future+Electronics, ComponentLink9Description=https://datasheet.octopart.com/CL10B225KP8NNNC-Samsung-Electro-Mechanics-datasheet-97040617.pdf, ComponentLink9URL=https://datasheet.octopart.com/CL10B225KP8NNNC-Samsung-Electro-Mechanics-datasheet-97040617.pdf, ComponentLink10Description=https://datasheet.octopart.com/CL10B225KP8NNNC-Samsung-Electro-Mechanics-datasheet-8324245.pdf, ComponentLink10URL=https://datasheet.octopart.com/CL10B225KP8NNNC-Samsung-Electro-Mechanics-datasheet-8324245.pdf, ComponentLink11Description=https://datasheet.octopart.com:443/CL10B225KP8NNNC-Samsung-Electro-Mechanics-datasheet-11840088.pdf?src-supplier=Arrow+Electronics, ComponentLink11URL=https://datasheet.octopart.com:443/CL10B225KP8NNNC-Samsung-Electro-Mechanics-datasheet-11840088.pdf?src-supplier=Arrow+Electronics, ComponentLink12Description=https://datasheet.octopart.com:443/CL10B225KP8NNNC-Samsung-datasheet-59220082.pdf?src-supplier=TME, ComponentLink12URL=https://datasheet.octopart.com:443/CL10B225KP8NNNC-Samsung-datasheet-59220082.pdf?src-supplier=TME, Contact Plating=Tin, Depth=800µm, Height=900µm, Length=1.6mm, Lifecycle Status=Production, Material=Ceramic, Mounting Technology="Surface Mount", Number of Terminals=2, Pricing="1=0.08, 10=0.047, 50=0.0376, 100=0.028, 500=0.0224, 1000=0.02, 4000=0.0104 (USD)", Radiation Hardening=No, REACH SVHC=Yes, RoHS=Compliant, Schedule B="8532240020, 8532240020|8532240020, 8532240020|8532240020|8532240020, 8532240020|8532240020|8532240020|8532240020", Stock=3647, Supplier=DigiKey, Supplier 1=DigiKey, Supplier Part Number 1=1276-1134-1-ND, Thickness=889µm, Voltage Rating (DC)=10V, Width=800µm
C15 C16 C18: library part "CAP 1uF 0603", "16V 1uF X7R ±10% 0603 Multilayer Ceramic Capacitors MLCC - SMD/SMT ROHS", Case Code (Imperial)=0603, Case Code (Metric)=1608, Dielectric=X7R, Dielectric Material=Ceramic, Manufacturer="Samsung Electro-Mechanics", Manufacturer Part Number=CL10B105KO8NNNC, Max Operating Temperature=125°C, Min Operating Temperature=-55°C, Supplier Part Number=1276-1019-1-ND, Tolerance=10%, Voltage=16V, Case/Package=0603, Category="Ceramic Capacitors", China RoHS=Compliant, ComponentLink1Description=https://datasheet.octopart.com:443/CL10B105KO8NNNC-Samsung-Electro-Mechanics-datasheet-137745070.pdf?src-supplier=IHS, ComponentLink1URL=https://datasheet.octopart.com:443/CL10B105KO8NNNC-Samsung-Electro-Mechanics-datasheet-137745070.pdf?src-supplier=IHS, ComponentLink2Description=https://datasheet.octopart.com/CL10B105KO8NNNC-Samsung-Electro-Mechanics-datasheet-8324245.pdf, ComponentLink2URL=https://datasheet.octopart.com/CL10B105KO8NNNC-Samsung-Electro-Mechanics-datasheet-8324245.pdf, ComponentLink3Description=https://datasheet.octopart.com/CL10B105KO8NNNC-Samsung-Electro-Mechanics-datasheet-97040617.pdf, ComponentLink3URL=https://datasheet.octopart.com/CL10B105KO8NNNC-Samsung-Electro-Mechanics-datasheet-97040617.pdf, ComponentLink4Description=https://datasheet.octopart.com/General-Multilayer-Ceramic-Capacitors-Samsung-datasheet-family-111.pdf, ComponentLink4URL=https://datasheet.octopart.com/General-Multilayer-Ceramic-Capacitors-Samsung-datasheet-family-111.pdf, ComponentLink5Description=https://datasheet.octopart.com:443/CL10B105KO8NNNC-Samsung-Electro-Mechanics-datasheet-116890984.pdf?src-supplier=Future+Electronics, ComponentLink5URL=https://datasheet.octopart.com:443/CL10B105KO8NNNC-Samsung-Electro-Mechanics-datasheet-116890984.pdf?src-supplier=Future+Electronics, ComponentLink6Description=https://datasheet.octopart.com:443/CL10B105KO8NNNC-Samsung-Electro-Mechanics-datasheet-81461852.pdf?src-supplier=Future+Electronics, ComponentLink6URL=https://datasheet.octopart.com:443/CL10B105KO8NNNC-Samsung-Electro-Mechanics-datasheet-81461852.pdf?src-supplier=Future+Electronics, ComponentLink7Description=https://datasheet.octopart.com:443/CL10B105KO8NNNC-Samsung-datasheet-42770397.pdf?src-supplier=Future+Electronics, ComponentLink7URL=https://datasheet.octopart.com:443/CL10B105KO8NNNC-Samsung-datasheet-42770397.pdf?src-supplier=Future+Electronics, ComponentLink8Description=https://datasheet.octopart.com:443/CL10B105KO8NNNC-Samsung-datasheet-26669023.pdf?src-supplier=Future+Electronics, ComponentLink8URL=https://datasheet.octopart.com:443/CL10B105KO8NNNC-Samsung-datasheet-26669023.pdf?src-supplier=Future+Electronics, ComponentLink9Description=https://datasheet.octopart.com:443/CL10B105KO8NNNC-Samsung-Electro-Mechanics-datasheet-149136799.pdf?src-supplier=Future+Electronics, ComponentLink9URL=https://datasheet.octopart.com:443/CL10B105KO8NNNC-Samsung-Electro-Mechanics-datasheet-149136799.pdf?src-supplier=Future+Electronics, ComponentLink10Description=https://datasheet.octopart.com:443/CL10B105KO8NNNC-Samsung-datasheet-151956584.pdf?src-supplier=SOS+electronic, ComponentLink10URL=https://datasheet.octopart.com:443/CL10B105KO8NNNC-Samsung-datasheet-151956584.pdf?src-supplier=SOS+electronic, ComponentLink11Description=https://datasheet.octopart.com:443/CL10B105KO8NNNC-Samsung-Electro-Mechanics-datasheet-11774093.pdf?src-supplier=Arrow+Electronics, ComponentLink11URL=https://datasheet.octopart.com:443/CL10B105KO8NNNC-Samsung-Electro-Mechanics-datasheet-11774093.pdf?src-supplier=Arrow+Electronics, ComponentLink12Description=https://datasheet.octopart.com:443/CL10B105KO8NNNC-Samsung-datasheet-59220082.pdf?src-supplier=TME, ComponentLink12URL=https://datasheet.octopart.com:443/CL10B105KO8NNNC-Samsung-datasheet-59220082.pdf?src-supplier=TME, ComponentLink13Description=http://sigma.octopart.com:80/rohs_certificate/General-Multilayer-Ceramic-Capacitors-Samsung-family-110.pdf?src-supplier=Compliance+Statements, ComponentLink13URL=http://sigma.octopart.com:80/rohs_certificate/General-Multilayer-Ceramic-Capacitors-Samsung-family-110.pdf?src-supplier=Compliance+Statements, ComponentLink14Description=http://sigma.octopart.com:80/rohs_statement/General-Multilayer-Ceramic-Capacitors-Samsung-family-132.pdf?src-supplier=Compliance+Statements, ComponentLink14URL=http://sigma.octopart.com:80/rohs_statement/General-Multilayer-Ceramic-Capacitors-Samsung-family-132.pdf?src-supplier=Compliance+Statements, ComponentLink15Description=http://sigma.octopart.com:80/reach_statement/General-Multilayer-Ceramic-Capacitors-Samsung-family-133.pdf?src-supplier=Compliance+Statements, ComponentLink15URL=http://sigma.octopart.com:80/reach_statement/General-Multilayer-Ceramic-Capacitors-Samsung-family-133.pdf?src-supplier=Compliance+Statements, Depth=800µm, Height=800µm, Lead Free="Lead Free", Length=1.6mm, Lifecycle Status=Production, Material=Ceramic, Mounting Technology="Surface Mount", Number of Terminals=2, Pricing="1=0.08, 10=0.011, 50=0.010, 100=0.0088 (USD)", Radiation Hardening=No, REACH SVHC=Yes, RoHS=Compliant, Schedule B="8532240020, 8532240020|8532240020, 8532240020|8532240020|8532240020, 8532240020|8532240020|8532240020|8532240020", Stock=1501586, Supplier=DigiKey, Supplier 1=DigiKey, Supplier Part Number 1=1276-1019-1-ND, Thickness=889µm, Voltage Rating=16V, Voltage Rating (DC)=16V, Width=800µm